# Altium PCB AFE#1.PcbDoc
Units mm, origin at the board's own origin, x right, y up, seen from the top; angles counter-clockwise.
Board outline 43.03 x 43.18 mm, 4 copper layers (Top Layer, Int1 (GND), Int2 (GND), Bottom Layer), stack 1.56 mm thick; 65 components, 51 nets, 213 pads, 60 vias.
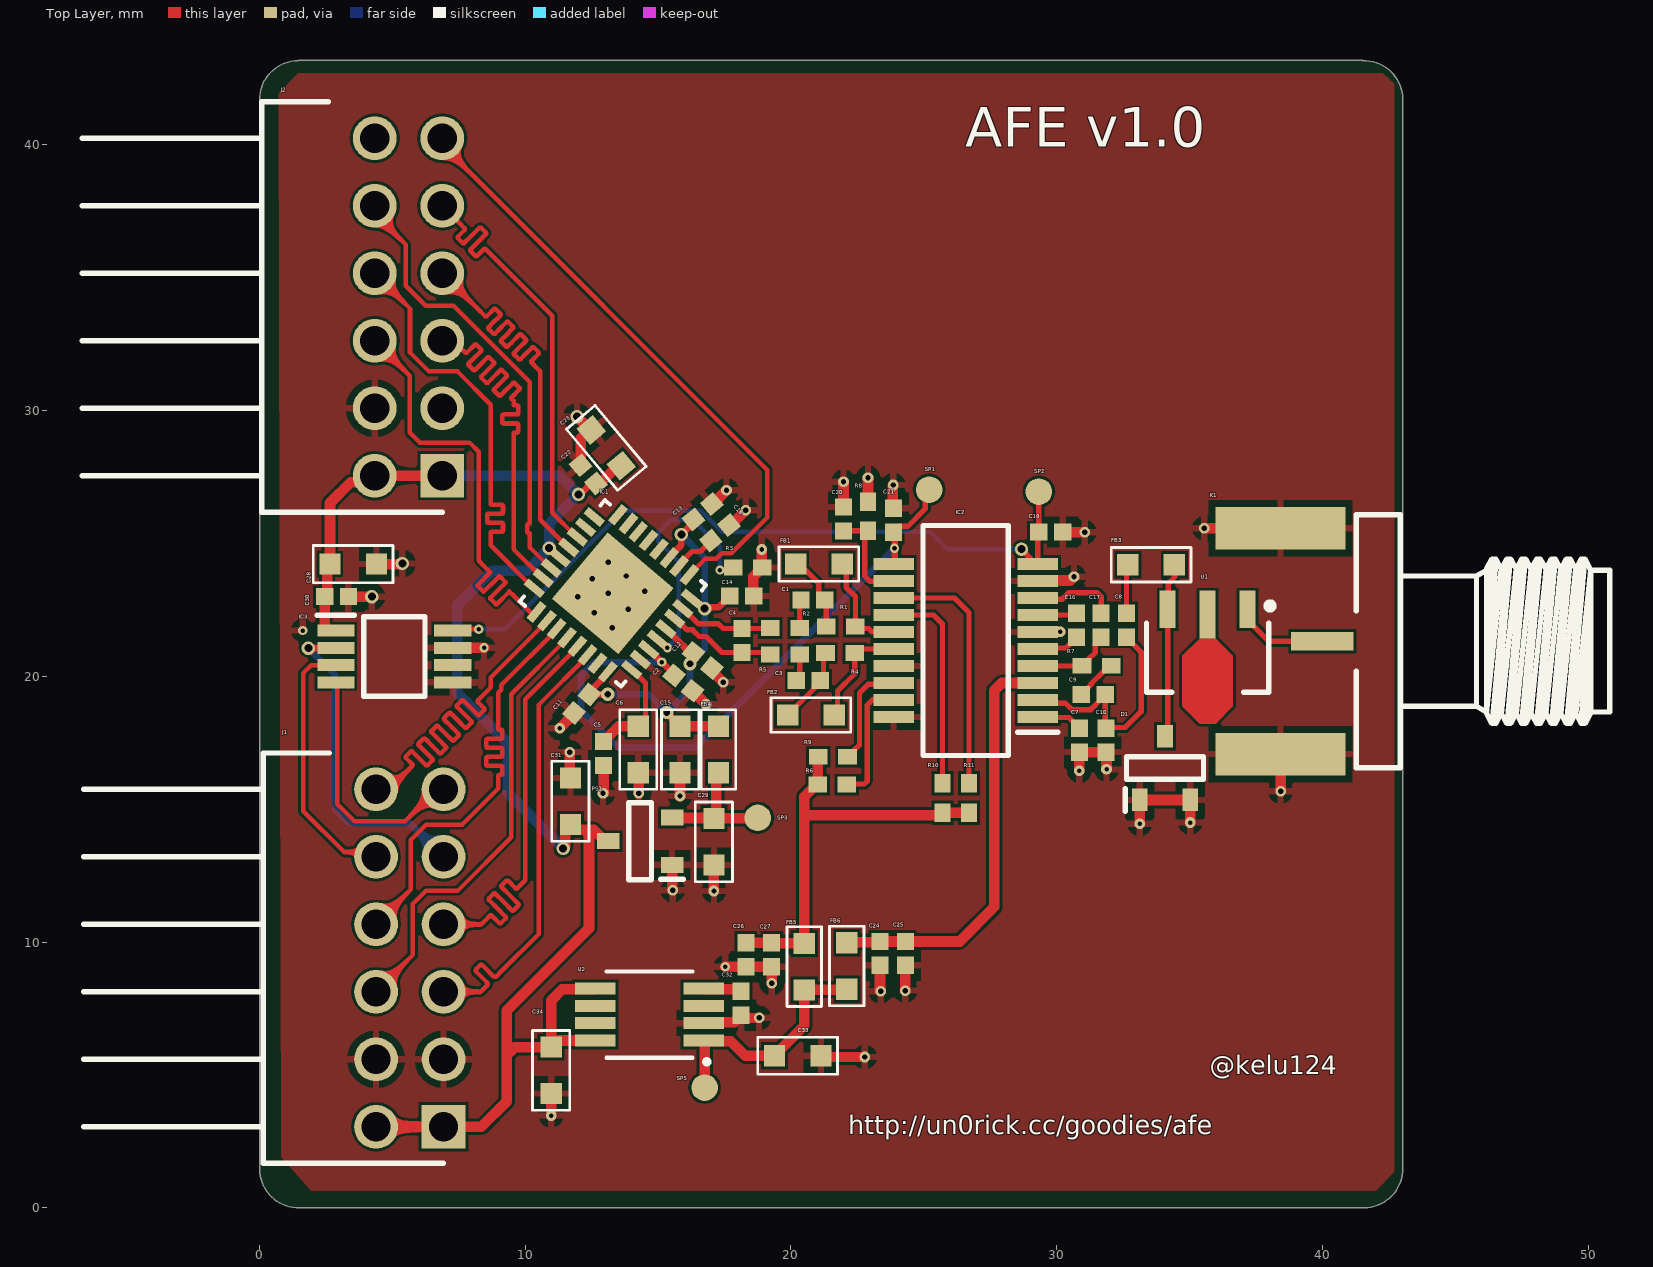
[diagram p0: Top Layer view]
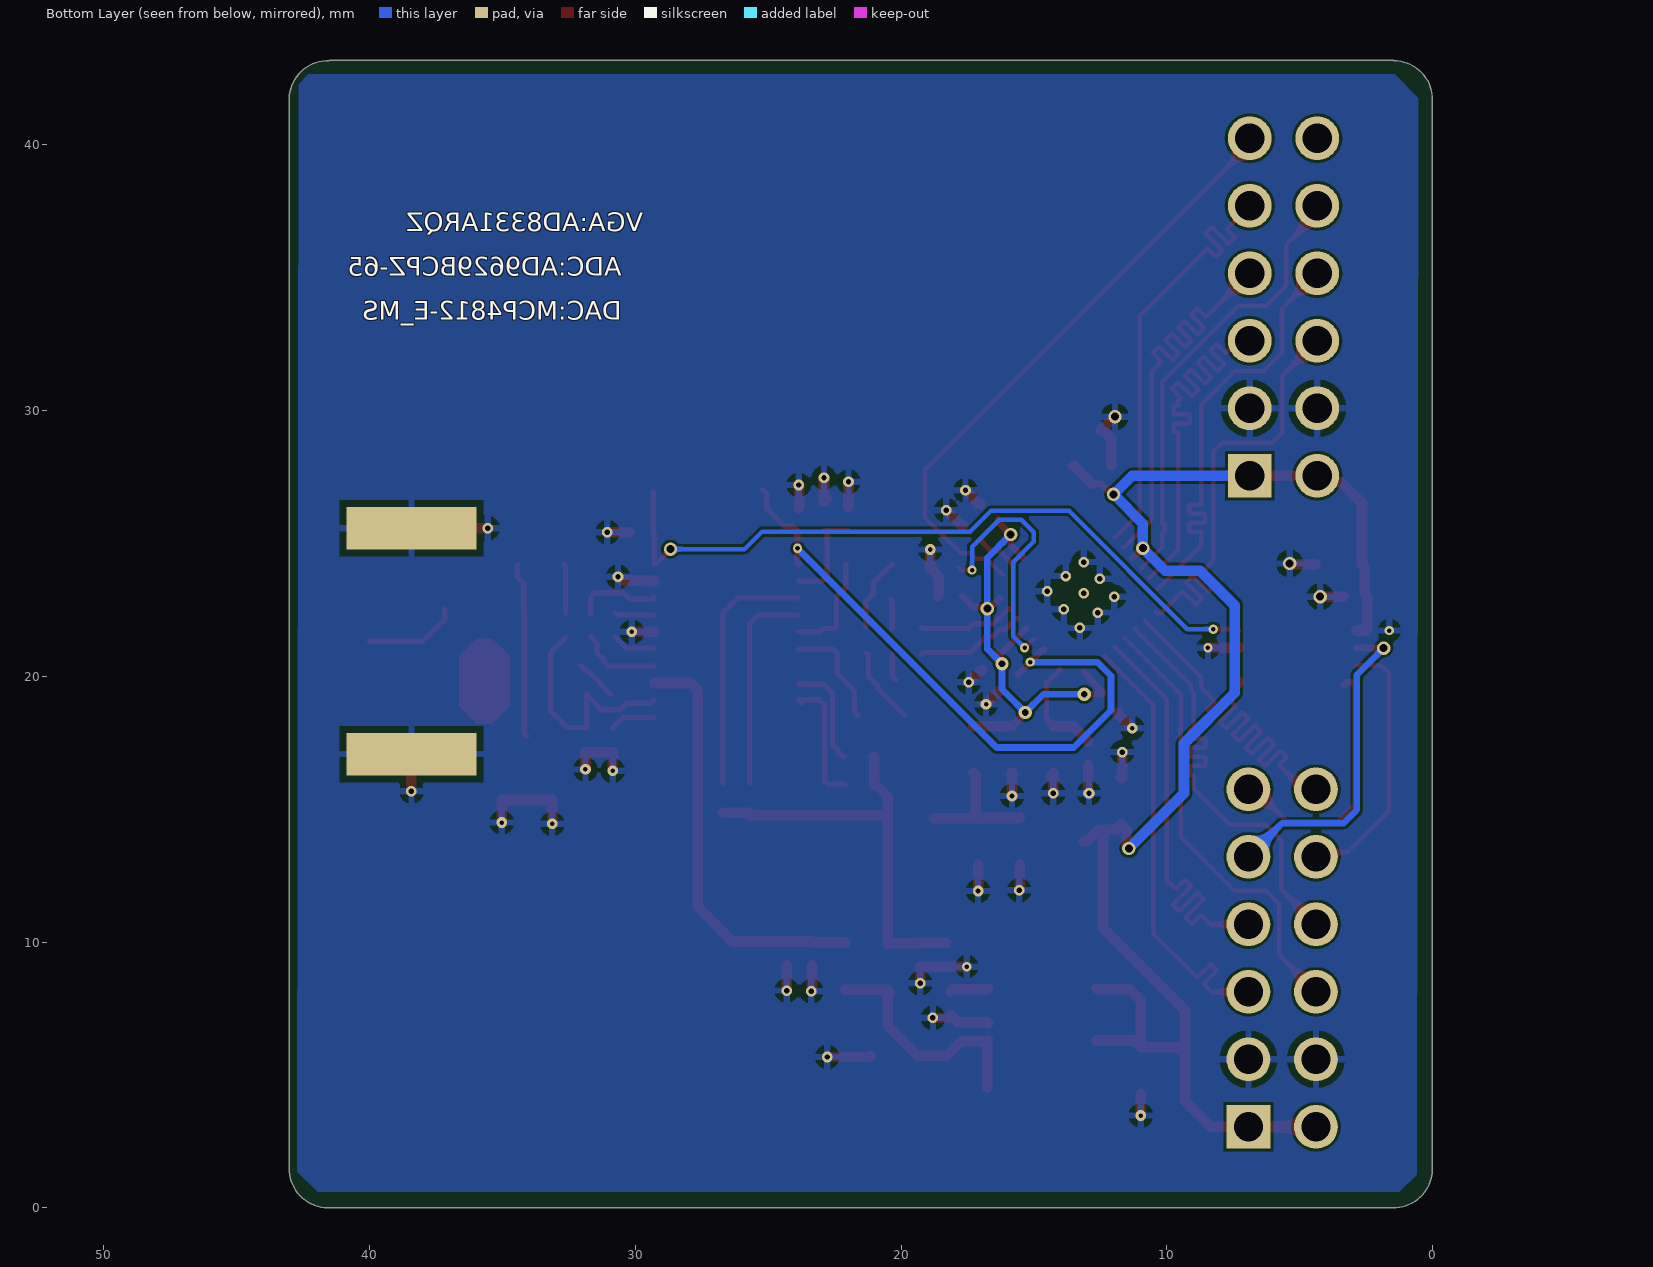
[diagram p1: Bottom Layer view, seen from below]
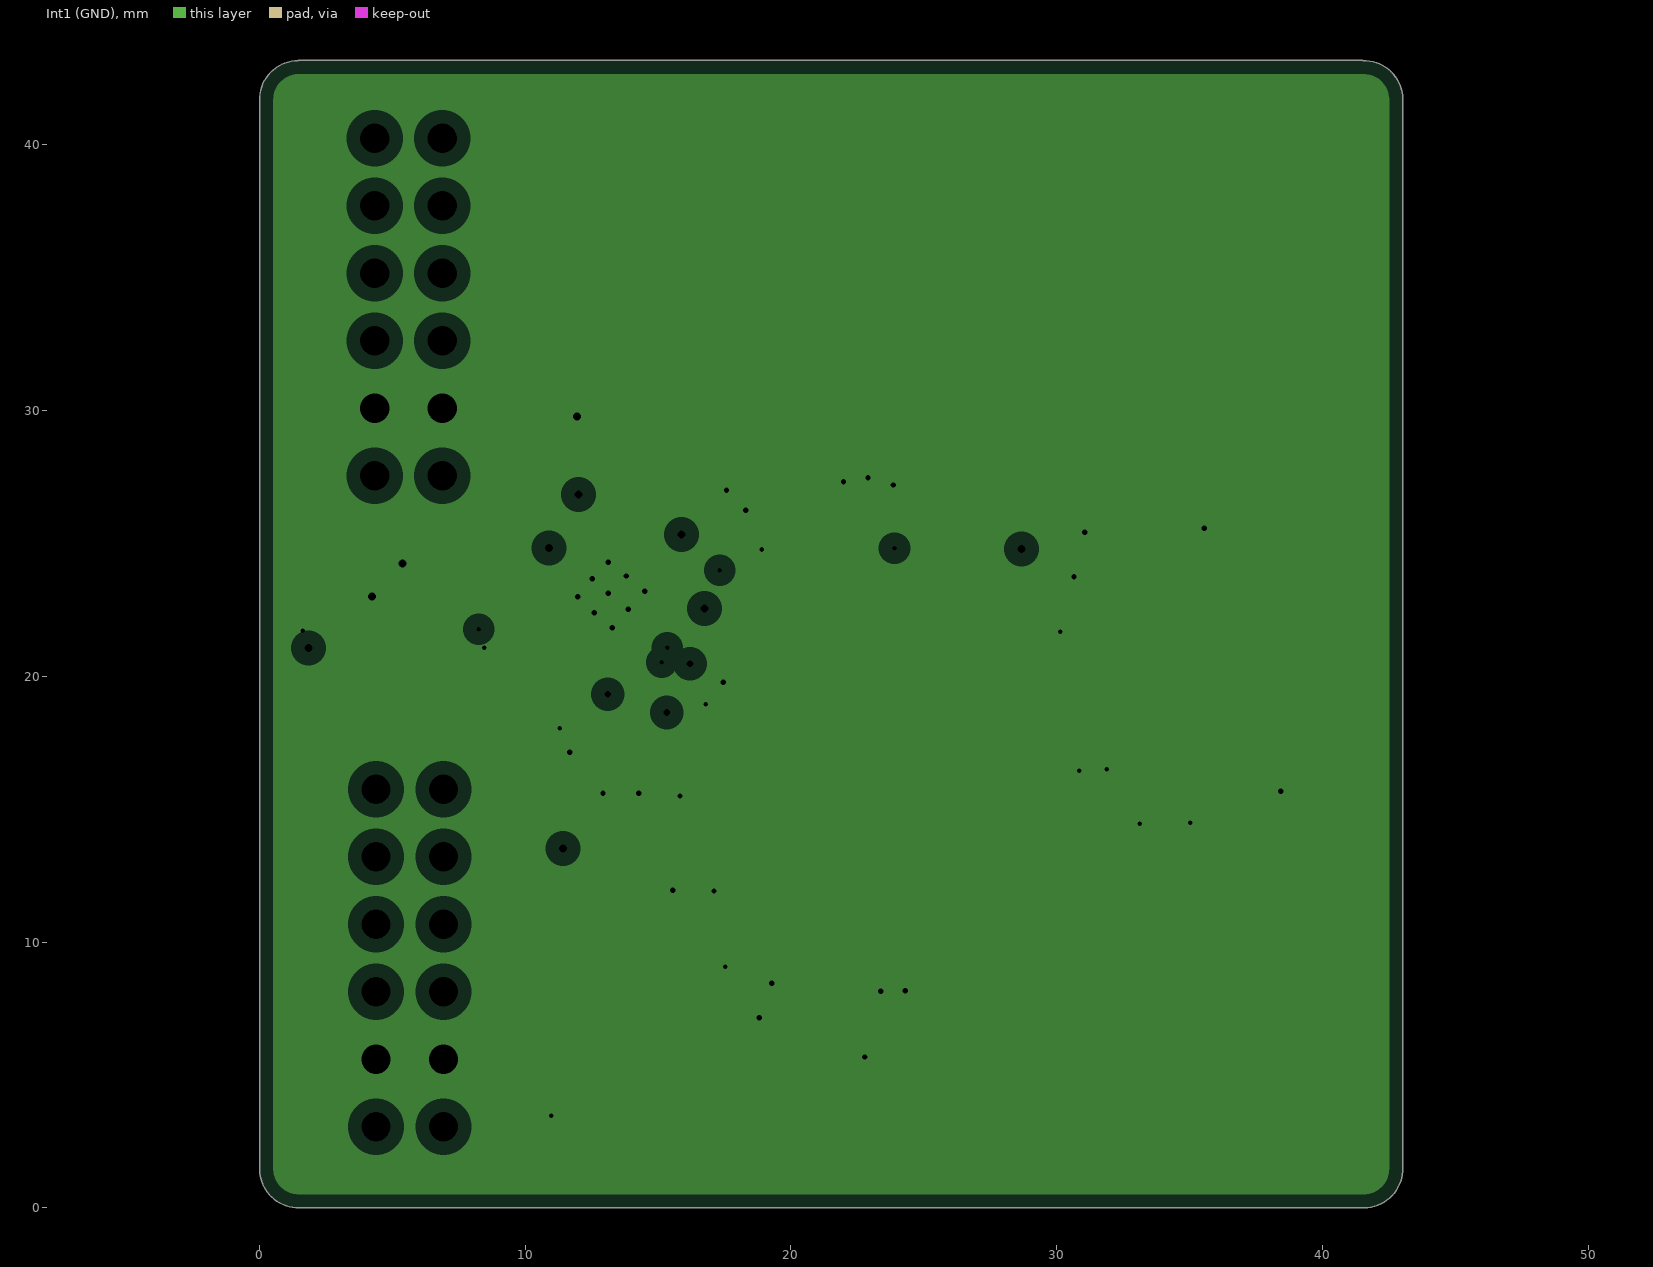
[diagram p2: Int1 (GND), clearances drawn from the general rule]
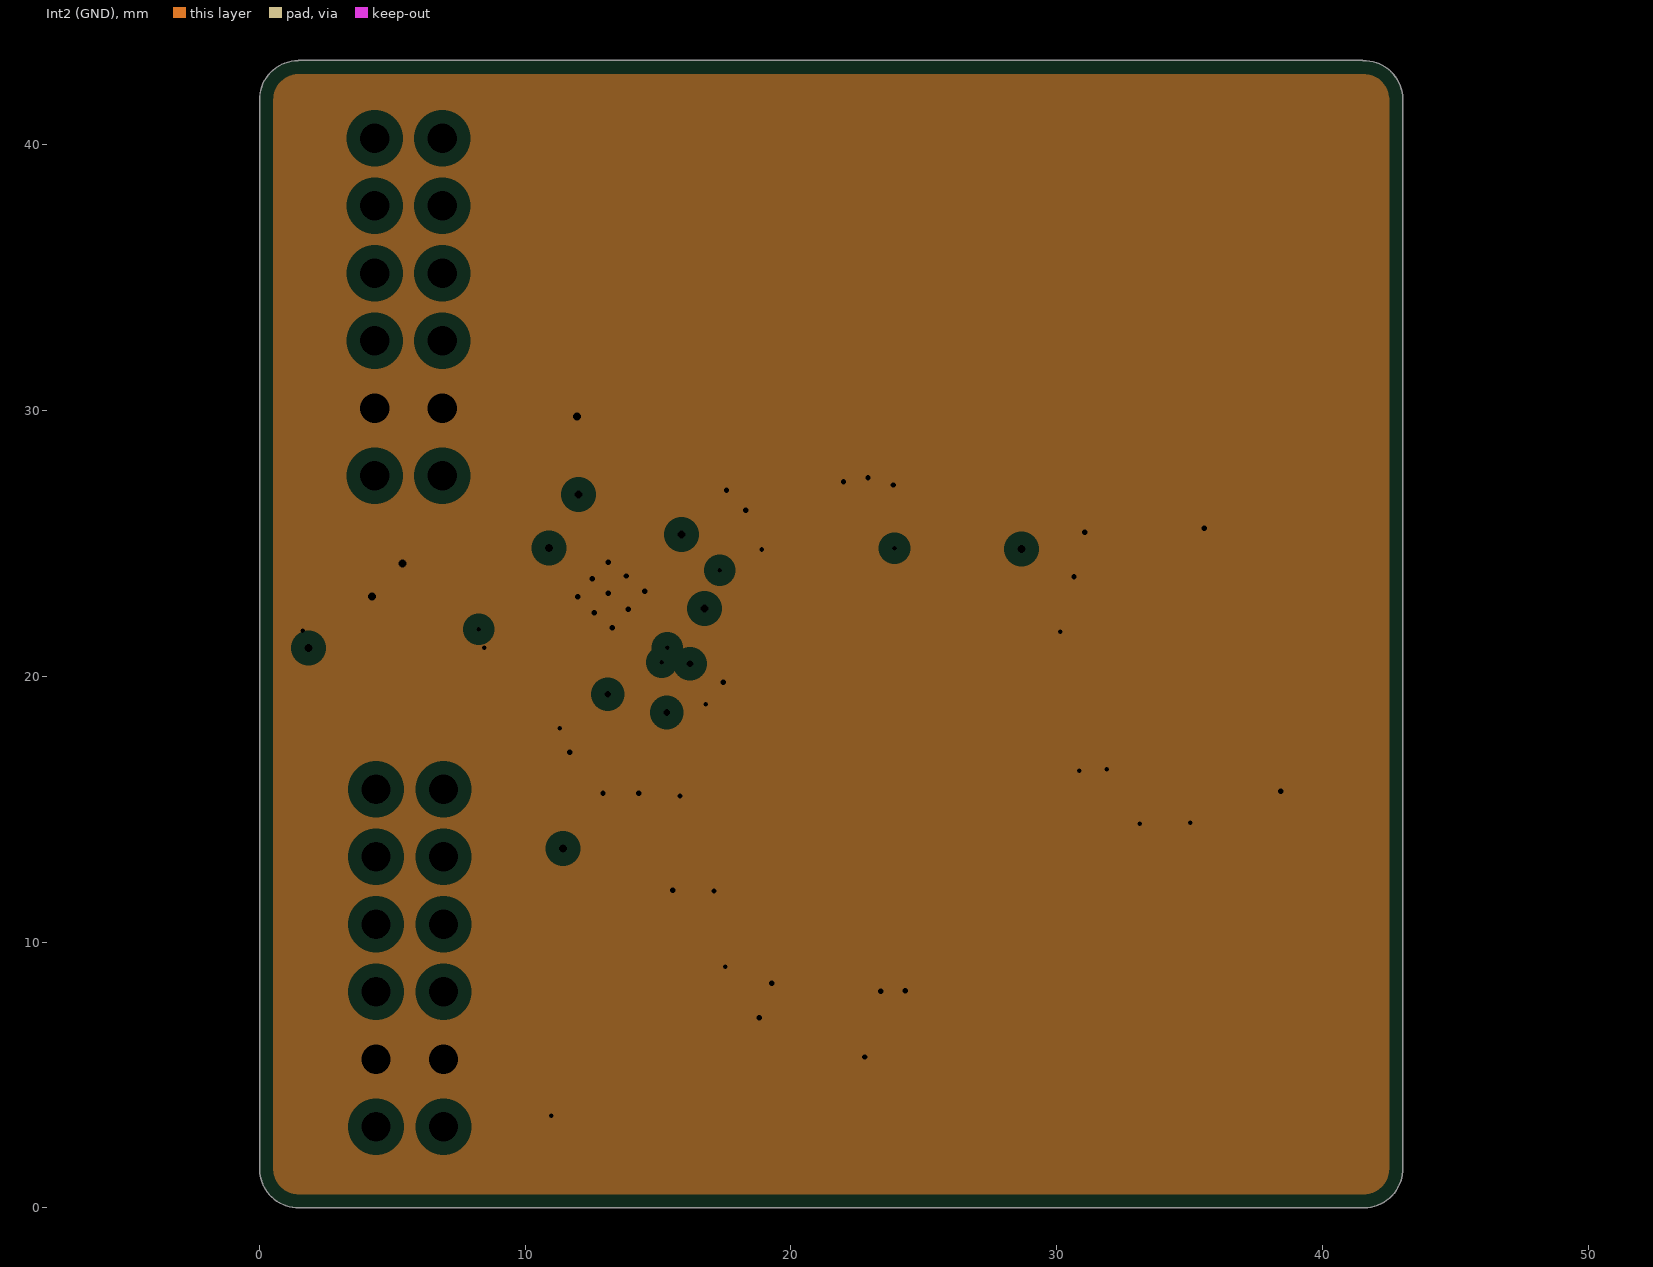
[diagram p3: Int2 (GND), clearances drawn from the general rule]
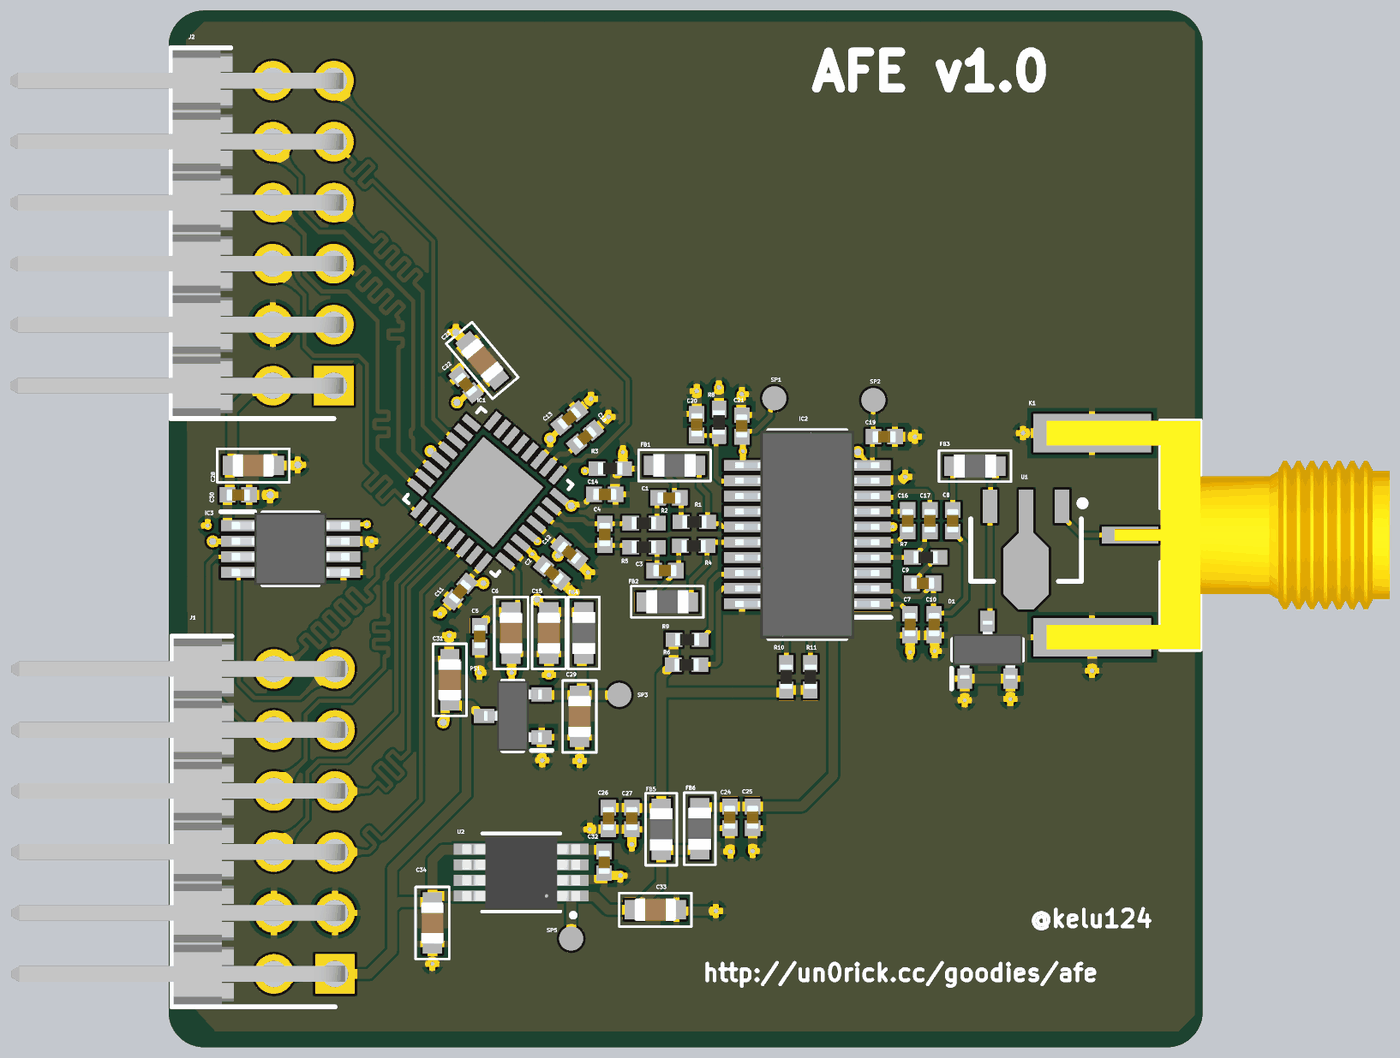
[diagram p4: 3D render of the assembled board from above, using the file's embedded part models]

## Layer stack, top to bottom
Top Solder: solder mask 0.0254, SM-001, Dk 4
Top Layer: signal copper 0.035
Dielectric 1: prepreg 0.11, PP-017, Dk 4.3
Int1 (GND): plane copper 0.035, net GND
Dielectric 3: core 1.2, Core-039, Dk 4.8
Int2 (GND): plane copper 0.035, net GND
Dielectric 5: prepreg 0.11, PP-017, Dk 4.3
Bottom Layer: signal copper 0.035
Bottom Solder: solder mask 0.0254, SM-001, Dk 4

## Board outline
0,1.45 0,41.675 cw(c1.475,41.7) 1.45,43.175 1.45,43.18 41.525,43.18 41.525,43.175 cw(c41.55,41.7) 43.025,41.725 43.025,1.5 cw(c41.55,1.475) 41.575,0 41.55,0 1.5,0 cw(c1.475,1.475)

## Design rules (kind name [scope] priority, off if disabled: settings)
Clearance [All] p1: gap=0.1 ignorepadtopadclearanceinfootprint=TRUE
ComponentClearance [All] p1: gap=0 collisioncheckmode=3 verticalgap=0 showdistances=FALSE
MatchedLengths "Schematic Matched Net Lengths" [InNetClass('Data')] p1: tolerance=0.508 checknetsindiffpair=FALSE checkdiffpairvsdiffpair=TRUE checkxsignals=TRUE checkothers=TRUE
PlaneClearance [All] p1: clearance=0.508
PlaneConnect [All] p1: planeconnectstyle=Relief reliefexpansion=0.508 reliefentries=4 reliefconductorwidth=0.254 reliefairgap=0.254
PolygonConnect [All] p1: connectstyle=Relief reliefconductorwidth=0.254 reliefentries=4 polygonreliefangle="90 Angle" airgapwidth=0.254
RoutingVias [All] p1: holewidth=0.2 width=0.4 viastyle="Through Hole" minholewidth=0.15 minwidth=0.3 maxholewidth=0.4 maxwidth=0.8
SilkToSilkClearance [All] p1: silktosilkclearance=0
SolderMaskExpansion [All] p1: expansion=0.102
UnRoutedNet [All] p1: checkbadconnections=TRUE
Width [All] p1: maxlimit=0.4 minlimit=0.15 preferedwidth=0.2
25 further rules are at their usual default settings.

## Classes and differential pairs
net class Data: D0 D1 D2 D3 D4 D5 D6 D7 D8 D9 DCO

## Components (designator, comment, footprint, x,y, rotation, side; value= is the part's Value field where it differs from the comment)
C1 "cap0402" 0402_C 20.825,22.875 r0 top value=100n
C2 "cap0402" 0402_C 15.95,19.75 r320 top value=100n
C3 "cap0402" 0402_C 20.65,19.85 r0 top value=100n
C4 "cap0402" 0402_C 18.15,21.35 r270 top value=18pf
C5 "cap0402" 0402_C 12.95,17.1 r90 top value=100n
C6 "cap0603" "SM0603 _3D_cap" 14.25,17.25 r90 top value=1u
C7 "cap0402" 0402_C 30.85,17.6 r90 top value=100n
C8 "cap0402" 0402_C 32.625,21.925 r270 top value=100n
C9 "cap0402" 0402_C 31.375,19.325 r0 top value=18n
C10 "cap0402" 0402_C 31.85,17.6 r90 top value=22pF
C11 "cap0402" 0402_C 12.125,18.975 r230 top value=100n
C12 "cap0402" 0402_C 16.675,20.6 r320 top value=100n
C13 "cap0402" 0402_C 16.675,26.2 r40 top value=100n
C14 "cap0402" 0402_C 18.15,23.025 r0 top value=100n
C15 "cap0402" "SM0603 _3D_cap" 15.825,17.25 r270 top value=10u
C16 "cap0402" 0402_C 30.75,21.925 r270 top value=100n
C17 "cap0402" 0402_C 31.675,21.925 r270 top value=100n
C18 "cap0402" 0402_C 17.325,25.4 r40 top value=100n
C19 "cap0402" 0402_C 29.775,25.425 r180 top value=1n
C20 "cap0402" 0402_C 21.975,25.925 r270 top value=100n
C21 "cap0402" 0402_C 23.85,25.875 r90 top value=100n
C22 "cap0402" 0402_C 12.375,27.6 r130 top value=100n
C23 "cap0603" "SM0603 _3D_cap" 13.05,28.6 r130 top value=10u
C24 "cap0402" 0402_C 23.35,9.575 r90 top value=1nf
C25 "cap0402" 0402_C 24.3,9.575 r90 top value=100nf
C26 "cap0402" 0402_C 18.3,9.525 r90 top value=1nf
C27 "cap0402" 0402_C 19.275,9.525 r90 top value=100nf
C28 "cap0603" "SM0603 _3D_cap" 3.525,24.225 r0 top value=10u
C29 "cap0603" "SM0603 _3D_cap" 17.1,13.775 r270 top value=4.7u
C30 "cap0402" 0402_C 2.9,23 r0 top value=100n
C31 "cap0603" "SM0603 _3D_cap" 11.7,15.3 r270 top value=4.7u
C32 "cap0402" 0402_C 18.125,7.7 r90 top value=470p
C33 "cap0603" "SM0603 _3D_cap" 20.25,5.725 r0 top value=1u
C34 "cap0603" "SM0603 _3D_cap" 10.975,5.175 r270 top value=1u
D1 "BAV99-7-F" SOT95P240X120-3N 34.075,16.55 r90 top
FB1 "75R@100MHz" SM0603_3D_res 21.05,24.225 r180 top
FB2 "75R@100MHz" SM0603_3D_res 20.75,18.55 r180 top
FB3 "75R@100MHz" SM0603_3D_res 33.55,24.2 r180 top
FB4 "75R@100MHz" SM0603_3D_res 17.275,17.25 r270 top
FB5 "75R@100MHz" SM0603_3D_res 20.5,9.075 r270 top
FB6 "75R@100MHz" SM0603_3D_res 22.1,9.1 r90 top
IC1 "AD9629BCPZ-65" QFN50P500X500X100-33N 13.3,23.125 r230 top
IC2 "AD8331ARQZ" SOP64P600X175-20N 26.575,21.35 r180 top
IC3 "MCP4812-E_MS" SOP65P490X110-8N 5.075,20.75 r0 top
J1 "90122-0126" HDRRA12W65P254_2X6_1516X250X615P 6.925,3.05 r90 top
J2 "90122-0126" HDRRA12W65P254_2X6_1516X250X615P 6.875,27.55 r90 top
K1 "SMA_Edge" AMPHENOL_132357-11 40,21.325 r180 top
PS1 "AP2127N-1.8TRG1" SOT89P240X110-3N 14.325,13.8 r180 top
R1 "100R" 0402_R 21.875,21.875 r180 top value=10k
R2 "18R" 0402_R 19.775,21.825 r180 top
R3 "10K" 0402_R 18.375,24.1 r180 top value=10k
R4 "100R" 0402_R 21.85,20.875 r180 top value=10k
R5 "18R" 0402_R 19.775,20.825 r180 top
R6 "10k" 0402_R 21.55,15.925 r0 top
R7 "280" 0402_R 31.5,20.4 r0 top
R8 "12k" 0402_R 22.9,26.025 r90 top
R9 "10k" 0402_R 21.575,16.975 r0 top
R10 "10k" 0402_R 25.7,15.425 r90 top
R11 "10k" 0402_R 26.7,15.425 r90 top
SP1 "SolderPad D1mm_round" "SolderPad_D1mm _round" 25.2,27.025 r90 top value="\"VCM\""
SP2 "SolderPad D1mm_round" "SolderPad_D1mm _round" 29.325,26.95 r90 top value="\"DG\""
SP3 "SolderPad D1mm_round" "SolderPad_D1mm _round" 18.75,14.675 r90 top value="\"+1.8V\""
SP5 "SolderPad D1mm_round" "SolderPad_D1mm _round" 16.75,4.525 r90 top value="\"+5V\""
U1 "T/R switch" SOT89-150P409X160-3N 35.675,20.725 r270 top
U2 "TC1107-5.0VUA" MSOP8_MC_MCH_ 14.675,7.275 r180 top

## Footprints (in the part's own frame and the unit in brackets; to place one, negate y for a bottom-side part, rotate by r counter-clockwise, add the part's x,y. Pads: shape width x height; smd on the part's side, far side on the other; paste and mask are expansions set on the pad)
0402_C [mm]
  rect 0.65x0.64 smd: 1(-0.45,0) 2(0.45,0)
  body extent -0.5,-0.25 0.5,0.25, height 0.56
0402_R [mm]
  rect 0.7x0.6 smd: 1(-0.55,0) 2(0.55,0)
  body extent -0.5,-0.25 0.5,0.25, height 0.35
AMPHENOL_132357-11 [mm]
  rect 2.35x0.7 smd: 1(0,0)
  rect 4.9x1.6 smd: 2(1.575,4.25) 2(1.575,-4.25)
  rect 4.9x1.6 smd far side: 2(1.575,4.25) 2(1.575,-4.25)
  silkscreen extent -10.81,-4.76 -1.28,4.76, body extent -10.8,-4.76 3.48,4.76, height 4.08
HDRRA12W65P254_2X6_1516X250X615P [mm]
  rect 1.65x1.65 hole 1.1: 1(0,0)
  round 1.65 hole 1.1: 2(0,2.54) 3(2.54,0) 4(2.54,2.54) 5(5.08,0) 6(5.08,2.54) 7(7.62,0) 8(7.62,2.54) 9(10.16,0) 10(10.16,2.54) 11(12.7,0) 12(12.7,2.54)
  silkscreen extent -1.37,0 14.07,13.54, body extent -1.27,-0.4 13.97,13.47, height 6.16
MSOP8_MC_MCH_ [mil]
  rect 60x18 smd paste+0 mask+0: 1(-80.5,38.39) 2(-80.5,12.8) 3(-80.5,-12.8) 4(-80.5,-38.39) 5(80.5,-38.39) 6(80.5,-12.8) 7(80.5,12.8) 8(80.5,38.39)
  silkscreen extent -87,-64 64,72, body extent -96,-59 96,59, height 43
QFN50P500X500X100-33N [mil]
  rect 32x12 smd: 1(-94,69) 2(-94,49) 3(-94,30) 4(-94,10) 5(-94,-10) 6(-94,-30) 7(-94,-49) 8(-94,-69) 17(94,-69) 18(94,-49) 19(94,-30) 20(94,-10) 21(94,10) 22(94,30) 23(94,49) 24(94,69)
  rect 12x32 smd: 9(-69,-94) 10(-49,-94) 11(-30,-94) 12(-10,-94) 13(10,-94) 14(30,-94) 15(49,-94) 16(69,-94) 25(69,94) 26(49,94) 27(30,94) 28(10,94) 29(-10,94) 30(-30,94) 31(-49,94) 32(-69,94)
  rect 128x128 smd: 33(0,0)
  silkscreen extent -98,-98 98,98
"SM0603 _3D_cap" [mm]
  rect 0.8x0.8 smd: 1(-0.875,0) 2(0.875,0)
  silkscreen extent -1.5,-0.7 1.5,0.7, body extent -0.87,-0.47 0.88,0.48, height 0.87
SM0603_3D_res [mm]
  rect 0.8x0.8 smd: 1(-0.875,0) 2(0.875,0)
  silkscreen extent -1.5,-0.65 1.5,0.65, body extent -0.87,-0.47 0.88,0.48, height 0.55
"SolderPad_D1mm _round" [mm]
  round 1 smd: 1(0,0)
SOP64P600X175-20N [mm]
  rect 1.52x0.44 smd: 1(-2.715,2.88) 2(-2.715,2.24) 3(-2.715,1.6) 4(-2.715,0.96) 5(-2.715,0.32) 6(-2.715,-0.32) 7(-2.715,-0.96) 8(-2.715,-1.6) 9(-2.715,-2.24) 10(-2.715,-2.88) 11(2.715,-2.88) 12(2.715,-2.24) 13(2.715,-1.6) 14(2.715,-0.96) 15(2.715,-0.32) 16(2.715,0.32) 17(2.715,0.96) 18(2.715,1.6) 19(2.715,2.24) 20(2.715,2.88)
  silkscreen extent -3.47,-4.33 1.61,4.33, body extent -3,-4.33 3,4.33, height 1.75
SOP65P490X110-8N [mm]
  rect 1.4x0.45 smd: 1(-2.2,0.975) 2(-2.2,0.325) 3(-2.2,-0.325) 4(-2.2,-0.975) 5(2.2,-0.975) 6(2.2,-0.325) 7(2.2,0.325) 8(2.2,0.975)
  silkscreen extent -2.9,-1.5 1.15,1.55, body extent -2.45,-1.5 2.45,1.5, height 1.1
SOT89-150P409X160-3N [mm]
  rect 1.4x0.6 smd: 1(-1.8,1.5) 3(-1.8,-1.5)
  rect 1.8x0.6 smd: 2(-1.6,0)
  Top Layer region: -0.7,0.3 -0.05,0.95 1.85,0.95 2.5,0.3 2.5,-0.3 1.85,-0.95 -0.05,-0.95 -0.7,-0.3
  silkscreen extent -2.05,-2.3 1.32,2.48, body extent -1.28,-2.3 1.32,2.3, height 1.6
SOT89P240X110-3N [mm]
  rect 0.85x0.6 smd: 1(-1.2,0.89) 2(-1.2,-0.89) 3(1.2,0)
  silkscreen extent -1.63,-1.45 0.43,1.45, body extent -1.2,-1.45 1.2,1.45, height 1.1
SOT95P240X120-3N [mm]
  rect 0.85x0.6 smd: 1(-1.2,0.95) 2(-1.2,-0.95) 3(1.2,0)
  silkscreen extent -1.63,-1.45 0.43,1.5, body extent -1.2,-1.45 1.2,1.45, height 1.2

## Part data
C1 C2 C3 C4 C5 C7 C8 C9 C10 C11 C12 C13 C14 C15 C16 C17 C18 C19 C20 C21 C22 C25 C27 C30 C32: library part cap0603, "Capacitor  0402 inch", LatestRevisionDate=17-Jul-2002, LatestRevisionNote="Re-released for DXP Platform.", PackageDescription="Radial Cap, Thru-Hole; 2 Leads; 0.3 in Pin Spacing", PackageReference=RAD-0.3, Published=8-Jun-2000, Publisher="Altium Limited"
C6 C23 C28 C29 C31 C33 C34: "Capacitor  0603 inch", LatestRevisionDate=17-Jul-2002, LatestRevisionNote="Re-released for DXP Platform.", PackageDescription="Radial Cap, Thru-Hole; 2 Leads; 0.3 in Pin Spacing", PackageReference=RAD-0.3, Published=8-Jun-2000, Publisher="Altium Limited"
C24 C26: library part cap0603, "Capacitor  0603 inch", LatestRevisionDate=17-Jul-2002, LatestRevisionNote="Re-released for DXP Platform.", PackageDescription="Radial Cap, Thru-Hole; 2 Leads; 0.3 in Pin Spacing", PackageReference=RAD-0.3, Published=8-Jun-2000, Publisher="Altium Limited"
D1: "Diode", Manufacturer_Name="Diodes Inc.", Mouser Part Number=621-BAV99-F, Arrow Part Number=BAV99-7-F, Arrow Price/Stock=https://www.arrow.com/en/products/bav99-7-f/diodes-incorporated?region=nac, Datasheet Link=https://www.diodes.com/assets/Datasheets/ds12007.pdf, Height=1.2mm, Manufacturer_Part_Number=BAV99-7-F, Mouser Price/Stock=https://www.mouser.co.uk/ProductDetail/Diodes-Incorporated/BAV99-7-F?qs=E9Ihi8A05%252BSTVRjo74hQDA%3D%3D
FB1 FB2 FB3 FB4 FB5 FB6: "chip inductance 0603", Case=0805, Manufacturer=MURATA, Manufacturer Part Number=BLM21BB750SN1D, Part Number=IND0805_MURATA_BLM21BB750SN1D, Power=700mA, Resistance=0.16R, Tolerance=±25%, Author="S. Jafar", ComponentHeight=1.05mm, Component Type=Standard, CreateDate=12/21/2015, LatestRevisionDate=12/21/2015, Mounted=Yes, Part Description="SMD EMIFIL Suppression Chip Ferrite Bead", Pin Count=2, SMD=Yes, Socket=No, Status=None, Table="Inductors SMD"
IC1: "Integrated Circuit", Manufacturer_Name="Analog Devices", Mouser Part Number=584-AD9629BCPZ-65, Arrow Part Number=AD9629BCPZ-65, Arrow Price/Stock=https://www.arrow.com/en/products/ad9629bcpz-65/analog-devices, Manufacturer_Part_Number=AD9629BCPZ-65, Mouser Price/Stock=https://www.mouser.co.uk/ProductDetail/Analog-Devices/AD9629BCPZ-65?qs=BpaRKvA4VqGjvk9AFyB3jg%3D%3D
IC2: "Integrated Circuit", Manufacturer_Name="Analog Devices", Mouser Part Number=584-AD8331ARQZ, Arrow Part Number=AD8331ARQZ, Arrow Price/Stock=https://www.arrow.com/en/products/ad8331arqz/analog-devices, Datasheet Link=http://www.analog.com/static/imported-files/data_sheets/AD8331_8332_8334.pdf, Height=1.75mm, Manufacturer_Part_Number=AD8331ARQZ, Mouser Price/Stock=https://www.mouser.co.uk/ProductDetail/Analog-Devices/AD8331ARQZ?qs=%2FtpEQrCGXCwx0%2F22gf7ohQ%3D%3D
IC3: "Integrated Circuit", Arrow Part Number=MCP4812-E/MS, Manufacturer_Name=Microchip, Mouser Part Number=579-MCP4812-E/MS, Arrow Price/Stock=https://www.arrow.com/en/products/mcp4812-ems/microchip-technology, Datasheet Link=http://ww1.microchip.com/downloads/en/DeviceDoc/20002249B.pdf, Height=1.1mm, Manufacturer_Part_Number=MCP4812-E/MS, Mouser Price/Stock=https://www.mouser.co.uk/ProductDetail/Microchip-Technology/MCP4812-E-MS?qs=bxUt0k7cytJEpyWPtzKy6A%3D%3D
J1 J2: "Connector", Manufacturer_Name=Molex, Mouser Part Number=538-90122-0126, Datasheet Link=https://componentsearchengine.com/Datasheets/2/90122-0126.pdf, Height=6.15mm, Manufacturer_Part_Number=90122-0126, Mouser Price/Stock=https://www.mouser.co.uk/ProductDetail/Molex/90122-0126?qs=PvP5v7Eimsm0iCqn6boA0w%3D%3D
PS1: library part AP2127N-3.3TRG1, "Power Supply", Manufacturer_Name="Diodes Inc.", Mouser Part Number=621-AP2127N-3.3TRG1, Arrow Part Number=AP2127N-3.3TRG1, Arrow Price/Stock=https://www.arrow.com/en/products/ap2127n-3.3trg1/diodes-incorporated, Datasheet Link=https://componentsearchengine.com/Datasheets/1/AP2127N-3.3TRG1.pdf, Height=1.1mm, Manufacturer_Part_Number=AP2127N-3.3TRG1, Mouser Price/Stock=https://www.mouser.co.uk/ProductDetail/Diodes-Incorporated/AP2127N-33TRG1/?qs=x6A8l6qLYDCwIat%252BGHxAAg%3D%3D
R1 R3 R4: library part RC0402FR-0710KL, "RES 10K OHM 1/16W 0402 SMD", Package / Case="0402 (1005 Metric)", Power (Watts)="0.063W, 1/16W", .Checked PCB=used, .Checked SCH=used, Category=Resistors, ComponentLink1Description=http://www.yageo.com/documents/recent/PYu-RC0402_51_RoHS_L_6.pdf, ComponentLink1URL=http://www.yageo.com/documents/recent/PYu-RC0402_51_RoHS_L_6.pdf, Height="0.016\" (0.40mm)", Size / Dimension="0.039\" L x 0.020\" W (1.00mm x 0.50mm)"
R2 R5: library part RC0402FR-0710KL, "RES 18 OHM 1/16W 0402 SMD", Package / Case="0402 (1005 Metric)", Power (Watts)="0.063W, 1/16W", .Checked PCB=used, .Checked SCH=used, Category=Resistors, ComponentLink1Description=http://www.yageo.com/documents/recent/PYu-RC0402_51_RoHS_L_6.pdf, ComponentLink1URL=http://www.yageo.com/documents/recent/PYu-RC0402_51_RoHS_L_6.pdf, Height="0.016\" (0.40mm)", Size / Dimension="0.039\" L x 0.020\" W (1.00mm x 0.50mm)"
R6 R9 R10 R11: library part RC0402FR-0710KL, "RES 10K OHM 1/16W 1% 0402 SMD", Package / Case="0402 (1005 Metric)", Power (Watts)="0.063W, 1/16W", Resistance (Ohms)=280, .Checked PCB=used, .Checked SCH=used, Category=Resistors, ComponentLink1Description=http://www.yageo.com/documents/recent/PYu-RC0402_51_RoHS_L_6.pdf, ComponentLink1URL=http://www.yageo.com/documents/recent/PYu-RC0402_51_RoHS_L_6.pdf, Height="0.016\" (0.40mm)", Size / Dimension="0.039\" L x 0.020\" W (1.00mm x 0.50mm)"
R7: library part RC0402FR-0710KL, "RES 280 OHM 1/16W 0402 SMD", Package / Case="0402 (1005 Metric)", Power (Watts)="0.063W, 1/16W", .Checked PCB=used, .Checked SCH=used, Category=Resistors, ComponentLink1Description=http://www.yageo.com/documents/recent/PYu-RC0402_51_RoHS_L_6.pdf, ComponentLink1URL=http://www.yageo.com/documents/recent/PYu-RC0402_51_RoHS_L_6.pdf, Height="0.016\" (0.40mm)", Resistance (Ohms)=280, Size / Dimension="0.039\" L x 0.020\" W (1.00mm x 0.50mm)"
R8: library part RC0402FR-0710KL, "RES 12K OHM 1/16W 0402 SMD", Package / Case="0402 (1005 Metric)", Power (Watts)="0.063W, 1/16W", .Checked PCB=used, .Checked SCH=used, Category=Resistors, ComponentLink1Description=http://www.yageo.com/documents/recent/PYu-RC0402_51_RoHS_L_6.pdf, ComponentLink1URL=http://www.yageo.com/documents/recent/PYu-RC0402_51_RoHS_L_6.pdf, Height="0.016\" (0.40mm)", Size / Dimension="0.039\" L x 0.020\" W (1.00mm x 0.50mm)"
SP1 SP2 SP3 SP5: "for finger touch"
U1: library part MD0100N8-G
U2: "No Description Available", Mfr_Name=Microchip, Copyright="Copyright (C) 2022 Ultra Librarian. All rights reserved.", Manufacturer_Part_Number=TC1107-5.0VUA, RefDes=RefDes, Type=DEV

## Via types
v1: diameter 0.4, hole 0.2, Top Layer to Bottom Layer, 30 vias
v2: diameter 0.5, hole 0.3, Top Layer to Bottom Layer, 10 vias
v3: diameter 0.4, hole 0.17, Top Layer to Bottom Layer, 9 vias
v4: diameter 0.35, hole 0.17, Top Layer to Bottom Layer, 8 vias
v5: diameter 0.5, hole 0.254, Top Layer to Bottom Layer, 3 vias

## Nets (pads, with @x,y where several pads share a name; then routed paths per layer and width w, separated by ;. In a path a pad name is that pad's centre, name@x,y a point inside that pad or via, vN(x,y) a via of type N, cw(c..) or ccw(c..) an arc to the next point about the centre after c; other vN are vias at no path point)
5VLNA: C24.2 C25.2 FB6.2 IC2.3 | length 16
  Top Layer w0.4: FB6.2 22.125,10 23.325,10 C24.2 C25.2 26.35,10.025 27.65,11.325 27.65,19.47 27.93,19.75 IC2.3
5VVGA: C26.2 C27.2 FB5.1 R6.1 R9.1 R10.1 R11.1 | length 15.7
  Top Layer w0.4: C26.2 C27.2 19.288,9.962 20.488,9.962 FB5.1 20.5,14.75 ; R9.1 21.013,16.963 21.013,15.938 R6.1 20.95,15.925 20.5,15.475 20.5,14.75 ; R10.1@25.7,14.775 20.525,14.775 20.5,14.75 ; R10.1 R11.1
+1V8: C29.1 FB4.2 PS1.2 SP3.1 | length 5
  Top Layer w0.4: PS1.2 15.545,14.67 17.08,14.67 C29.1 C29.1@17.113,14.662 ; FB4.2 17.188,16.287 17.188,14.737 C29.1@17.113,14.662 ; SP3.1 18.737,14.662 C29.1@17.113,14.662
+1V8f: C11.1 C12.1 C13.1 C14.1 C15.1 FB4.1 IC1.3 IC1.24 IC1.29 IC1.32 | length 19.7
  Top Layer w0.25: v5(13.1,19.325) 13.098,19.323 12.417,19.323 C11.1 12.414,19.414 12.931,19.931 12.931,19.98 12.925,19.987 IC1.24 ; IC1.29 15.315,21.785 15.315,21.774 16.255,20.833 16.255,20.814 C12.1 16.33,20.605 v5(16.2,20.475) ; IC1.3 15.418,24.493 15.875,24.95 v2(15.875,25.338) 16.33,25.794 C13.1 ; IC1.32 16.292,22.933 16.675,22.55 16.723,22.598 17.268,22.598 17.695,23.025 C14.1
  Top Layer w0.3: v5(15.325,18.638) 15.325,18.625 C15.1
  Top Layer w0.4: C15.1 FB4.1
  Bottom Layer w0.25: v5(13.1,19.325) 14.638,19.325 v5(15.325,18.638) 16.2,19.513 v5(16.2,20.475) 16.75,21.025 v2(16.75,22.55) 16.75,24.463 v2(15.875,25.338)
+3V3: C22.1 C23.1 C28.1 C30.1 C31.2 C34.1 IC1.13 IC3.1 J1.1 J1.2 J2.1 J2.2 PS1.3 U2.5 U2.8 | length 62.4
  Top Layer w0.25: v2(10.9,24.825) 10.925,24.825 11.285,24.465 IC1.13 IC1.13@11.273,24.5 ; v2(12,26.85) 12.068,26.85 12.473,27.255 C22.1 C22.1@12.801,27.255 ; C23.1@13.475,27.93 C23.1
  Top Layer w0.4: IC3.1 2.475,21.725 2.45,21.75 C30.1 2.55,23.1 2.55,24.125 C28.1 2.65,26.525 3.436,27.311 4.096,27.311 J2.2 J2.1 ; J1.2 J1.1 8.35,3.05 9.3,4 9.3,5.75 ; v2(11.425,13.525) 11.425,13.552 11.5,13.627 11.5,14.225 C31.2 11.9,14.225 12.245,14.225 ; U2.8 11.225,6.3 C34.1 ; U2.5 12.602,8.221 11.396,8.221 10.975,7.8 C34.1 ; C22.1@12.801,27.255 C23.1@13.475,27.93 ; PS1.3 13,13.8 12.575,14.225 12.245,14.225 ; 9.3,5.75 9.3,7.425 12.4,10.525 12.4,14.069 12.245,14.225 ; 9.3,5.75 9.6,6.05 C34.1
  Bottom Layer w0.4: J2.1 11.3,27.55 v2(12,26.85) 10.9,25.75 v2(10.9,24.825) 10.05,23.975 8.75,23.975 7.441,22.666 7.441,19.384 9.35,17.475 9.35,15.6 v2(11.425,13.525)
+5V: C33.1 FB5.2 FB6.1 SP5.1 U2.1 | length 9.3
  Top Layer w0.4: U2.1 16.748,6.271 U2.1@16.75,6.271 ; SP5.1 U2.1@16.75,6.271 ; FB6.1 22.087,8.213 20.513,8.213 FB5.2 20.425,8.125 20.5,8.05 20.5,6.85 C33.1 18.275,5.725 17.729,6.271 U2.1@16.75,6.271
CLK+: IC1.1 J2.11 | length 23.2
  Top Layer w0.17: J2.11 6.875,40 19.1,27.775 19.1,25.975 17.758,24.633 17.39,24.633 17.189,24.432 16.782,24.432 IC1.1
CS: IC3.2 J1.9 | length 12.5
  Top Layer w0.25: v2@1.95,20.95 v2(1.836,21.064) 1.842,21.069 2.869,21.069 IC3.2
  Bottom Layer w0.25: v2(1.836,21.064) 2.85,20.05 2.85,14.975 3.35,14.475 5.66,14.475 J1.9
D0: IC1.11 J2.9 | length 17.1
  Top Layer w0.17: J2.9 7.442,37.143 7.511,37.074 7.715,36.87 cw(c7.679,36.834) 7.715,36.798 7.47,36.553 ccw(c7.506,36.517) 7.47,36.481 7.638,36.312 ccw(c7.674,36.348) 7.71,36.312 7.991,36.594 8.273,36.875 cw(c8.309,36.839) 8.345,36.875 8.513,36.707 cw(c8.477,36.67) 8.513,36.634 8.232,36.353 7.951,36.072 ccw(c7.987,36.036) 7.951,36 8.119,35.831 ccw(c8.155,35.868) 8.191,35.831 8.436,36.077 cw(c8.472,36.041) 8.508,36.077 8.592,35.993 11.013,33.573 11.013,26.16 11.929,25.243 IC1.11
D1: IC1.12 J2.7 | length 17.2
  Top Layer w0.17: J2.7 8.235,33.81 8.485,33.56 ccw(c8.521,33.596) 8.558,33.56 8.814,33.816 cw(c8.85,33.78) 8.886,33.816 9.055,33.648 cw(c9.019,33.612) 9.055,33.576 8.762,33.283 8.622,33.143 ccw(c8.658,33.107) 8.622,33.071 8.79,32.902 ccw(c8.826,32.938) 8.862,32.902 9.002,33.043 9.295,33.336 cw(c9.331,33.3) 9.367,33.336 9.536,33.167 cw(c9.5,33.131) 9.536,33.095 9.243,32.802 9.102,32.662 ccw(c9.139,32.626) 9.102,32.59 9.271,32.422 ccw(c9.307,32.458) 9.343,32.422 9.483,32.562 9.776,32.855 cw(c9.812,32.819) 9.848,32.855 10.016,32.686 cw(c9.98,32.65) 10.016,32.614 9.724,32.321 9.583,32.181 ccw(c9.619,32.145) 9.583,32.109 9.752,31.941 ccw(c9.788,31.977) 9.824,31.941 9.964,32.081 10.257,32.374 cw(c10.293,32.338) 10.329,32.374 10.497,32.206 cw(c10.461,32.17) 10.497,32.133 10.24,31.877 ccw(c10.277,31.841) 10.24,31.805 10.445,31.6 10.565,31.48 10.565,25.892 11.603,24.854 IC1.12
D2: IC1.14 J2.10 | length 17.1
  Top Layer w0.17: J2.10 4.335,37.415 5.5,36.25 5.5,34.7 6.25,33.95 7.3,33.95 10.177,31.073 10.177,26.325 10.177,25.786 cw(c10.126,25.786) 10.126,25.735 ccw(c10.126,25.684) 10.075,25.684 10.075,25.446 ccw(c10.126,25.446) 10.126,25.395 cw(c10.126,25.344) 10.177,25.344 10.177,25.225 10.177,24.849 10.95,24.076 IC1.14
D3: IC1.15 J2.5 | length 17.3
  Top Layer w0.17: J2.5 7.275,32.63 7.63,32.275 7.65,32.275 7.734,32.191 ccw(c7.77,32.227) 7.806,32.191 8.093,32.478 cw(c8.129,32.442) 8.165,32.478 8.334,32.31 cw(c8.298,32.274) 8.334,32.238 8.011,31.914 7.875,31.779 ccw(c7.911,31.743) 7.875,31.707 8.043,31.538 ccw(c8.079,31.574) 8.115,31.538 8.251,31.674 8.574,31.997 cw(c8.61,31.961) 8.646,31.997 8.815,31.829 cw(c8.779,31.793) 8.815,31.757 8.491,31.434 8.356,31.298 ccw(c8.392,31.262) 8.356,31.226 8.524,31.058 ccw(c8.56,31.094) 8.596,31.058 8.732,31.193 9.055,31.516 cw(c9.091,31.48) 9.127,31.516 9.295,31.348 cw(c9.259,31.312) 9.295,31.276 8.972,30.953 8.837,30.817 ccw(c8.873,30.781) 8.837,30.745 9.005,30.577 ccw(c9.041,30.613) 9.077,30.577 9.213,30.712 9.536,31.035 cw(c9.572,30.999) 9.608,31.035 9.776,30.867 cw(c9.74,30.831) 9.776,30.795 9.489,30.508 ccw(c9.525,30.472) 9.489,30.436 9.559,30.366 9.559,30.247 ccw(c9.61,30.247) 9.61,30.196 9.686,30.196 cw(c9.686,30.145) 9.737,30.145 9.737,29.907 cw(c9.686,29.907) 9.686,29.856 9.559,29.856 9.19,29.856 ccw(c9.19,29.805) 9.139,29.805 9.139,29.567 ccw(c9.19,29.567) 9.19,29.516 9.559,29.516 9.686,29.516 cw(c9.686,29.465) 9.737,29.465 9.737,29.227 cw(c9.686,29.227) 9.686,29.176 9.61,29.176 ccw(c9.61,29.125) 9.559,29.125 9.559,28.45 9.559,24.787 10.64,23.706 IC1.15
D4: IC1.16 J2.8 | length 16.9
  Top Layer w0.17: J2.8 5.662,33.843 5.662,32.187 6.375,31.475 7.45,31.475 8.7,30.225 8.7,28 8.7,26.511 ccw(c8.751,26.511) 8.751,26.46 9.112,26.46 cw(c9.112,26.409) 9.163,26.409 9.163,26.171 cw(c9.112,26.171) 9.112,26.12 8.7,26.12 8.616,26.12 ccw(c8.616,26.069) 8.565,26.069 8.565,25.831 ccw(c8.616,25.831) 8.616,25.78 8.7,25.78 9.112,25.78 cw(c9.112,25.729) 9.163,25.729 9.163,25.491 cw(c9.112,25.491) 9.112,25.44 8.751,25.44 ccw(c8.751,25.389) 8.7,25.389 8.7,25.1 8.7,24.93 10.313,23.317 IC1.16
D5: IC1.17 J2.6 | length 17.1
  Top Layer w0.17: J2.6 5.65,31.315 5.65,29.175 6.025,28.8 7.9,28.8 8.25,28.45 8.25,24.35 8.45,24.15 8.684,23.916 8.2,23.433 ccw(c8.212,23.421) 8.2,23.409 8.417,23.193 ccw(c8.429,23.205) 8.441,23.193 8.924,23.676 9.013,23.765 cw(c9.025,23.753) 9.037,23.765 9.254,23.549 cw(c9.242,23.537) 9.254,23.525 9.164,23.436 8.681,22.952 ccw(c8.693,22.94) 8.681,22.928 8.897,22.712 ccw(c8.909,22.724) 8.921,22.712 9.405,23.195 9.525,23.075 10.075,22.525 10.228,22.372 10.372,22.372 IC1.17
D6: IC1.18 J1.12 | length 17.3
  Top Layer w0.17: J1.12 4.668,16.033 5.153,16.033 5.66,16.54 5.744,16.624 ccw(c5.708,16.66) 5.744,16.697 5.515,16.926 cw(c5.551,16.962) 5.515,16.998 5.683,17.166 cw(c5.719,17.13) 5.755,17.166 6.02,16.901 6.257,16.664 ccw(c6.293,16.7) 6.329,16.664 6.497,16.832 ccw(c6.461,16.869) 6.497,16.905 6.261,17.141 5.996,17.407 cw(c6.032,17.443) 5.996,17.479 6.164,17.647 cw(c6.2,17.611) 6.236,17.647 6.501,17.382 6.766,17.116 ccw(c6.802,17.153) 6.839,17.116 7.007,17.285 ccw(c6.971,17.321) 7.007,17.357 6.742,17.622 6.476,17.887 cw(c6.512,17.923) 6.476,17.959 6.645,18.128 cw(c6.681,18.092) 6.717,18.128 6.982,17.863 7.247,17.597 ccw(c7.283,17.633) 7.319,17.597 7.488,17.766 ccw(c7.452,17.802) 7.488,17.838 7.222,18.103 6.957,18.368 cw(c6.993,18.404) 6.957,18.44 7.125,18.609 cw(c7.162,18.573) 7.198,18.609 7.463,18.343 7.728,18.078 ccw(c7.764,18.114) 7.8,18.078 7.969,18.246 ccw(c7.932,18.282) 7.969,18.319 7.703,18.584 7.438,18.849 cw(c7.474,18.885) 7.438,18.921 7.606,19.089 cw(c7.642,19.053) 7.678,19.089 7.944,18.824 8.209,18.559 ccw(c8.245,18.595) 8.281,18.559 8.449,18.727 ccw(c8.413,18.763) 8.449,18.799 8.22,19.029 cw(c8.256,19.065) 8.22,19.101 8.397,19.278 8.71,19.591 8.71,19.963 10.812,22.065 IC1.18
D7: IC1.19 J1.8 | length 17.2
  Top Layer w0.17: J1.8 5.7,11.985 5.7,13.85 6.275,14.425 7.625,14.425 8.98,15.78 8.98,15.95 8.98,16.239 cw(c9.031,16.239) 9.031,16.29 9.088,16.29 ccw(c9.088,16.341) 9.139,16.341 9.139,16.579 ccw(c9.088,16.579) 9.088,16.63 8.98,16.63 8.59,16.63 cw(c8.59,16.681) 8.539,16.681 8.539,16.919 cw(c8.59,16.919) 8.59,16.97 8.98,16.97 9.088,16.97 ccw(c9.088,17.021) 9.139,17.021 9.139,17.259 ccw(c9.088,17.259) 9.088,17.31 8.98,17.31 8.59,17.31 cw(c8.59,17.361) 8.539,17.361 8.539,17.599 cw(c8.59,17.599) 8.59,17.65 8.98,17.65 9.088,17.65 ccw(c9.088,17.701) 9.139,17.701 9.139,17.939 ccw(c9.088,17.939) 9.088,17.99 9.031,17.99 cw(c9.031,18.041) 8.98,18.041 8.98,18.675 8.98,19.38 9.1,19.5 9.1,19.673 11.182,21.754 IC1.19
D8: IC1.20 J1.6 | length 17
  Top Layer w0.17: J1.6 5.775,9.52 5.775,11.45 6.25,11.925 7.45,11.925 9.475,13.95 9.475,19.332 11.571,21.428 IC1.20
D9: IC1.21 J1.7 | length 17.5
  Top Layer w0.17: J1.7@7.208,10.387 J1.7 8.345,10.67 8.465,10.79 8.67,10.995 cw(c8.706,10.958) 8.742,10.995 9.017,10.72 ccw(c9.053,10.756) 9.089,10.72 9.257,10.888 ccw(c9.221,10.924) 9.257,10.96 8.946,11.271 8.635,11.582 cw(c8.671,11.618) 8.635,11.654 8.803,11.823 cw(c8.839,11.786) 8.875,11.823 9.186,11.511 9.498,11.2 ccw(c9.534,11.236) 9.57,11.2 9.738,11.369 ccw(c9.702,11.405) 9.738,11.441 9.427,11.752 9.116,12.063 cw(c9.152,12.099) 9.116,12.135 9.284,12.303 cw(c9.32,12.267) 9.356,12.303 9.631,12.028 ccw(c9.667,12.064) 9.703,12.028 9.908,12.233 10,12.325 10,19.142 IC1.21@11.96,21.101
DAC_G: C19.2 IC2.10 IC3.8 SP2.1 | length 27.5
  Top Layer w0.17: IC3.8 7.325,21.775 v4(8.25,21.775) ; v2(28.675,24.785) 29.26,24.2 IC2.10
  Top Layer w0.2: IC2.10 29.29,25.39 C19.2 SP2.1
  Bottom Layer w0.17: v4(8.25,21.775) 9.225,21.775 13.675,26.225 16.625,26.225 17.4,25.45 25.225,25.45 25.89,24.785 v2(28.675,24.785)
DCO: IC1.22 J1.5 | length 17
  Top Layer w0.17: J1.5 8.33,8.13 8.5,8.3 8.56,8.36 ccw(c8.5,8.42) 8.56,8.48 8.163,8.877 cw(c8.224,8.937) 8.163,8.997 8.284,9.117 cw(c8.344,9.057) 8.404,9.117 8.801,8.721 ccw(c8.861,8.781) 8.921,8.721 9.1,8.9 10.5,10.3 10.5,18.926 IC1.22@12.349,20.775
GND: C2.2 C5.1 C6.1 C7.1 C10.1 C11.2 C12.2 C13.2 C14.2 C15.2 C18.2 C19.1 C20.1 C21.2 C22.2 C23.2 C24.1 C25.1 C26.1 C27.1 C28.2 C29.2 C30.2 C31.1 C32.1 C33.2 C34.2 D1.1 D1.2 IC1.26 IC1.33 IC2.6 IC2.9 IC2.17 IC2.20 IC3.5 IC3.7 J1.3 J1.4 J2.3 J2.4 K1.2 PS1.1 R3.1 R8.2 U2.2 | length 42.4
  Top Layer w0.381: v4(17.525,9.075) C26.1 C27.1 v1(19.275,8.45) ; C32.1 18.225,7.15 v1(18.8,7.15) ; C33.2 21.175,5.675 v1(22.775,5.675)
  Top Layer w0.4: C30.2 v2(4.225,23) ; C28.2 5.35,24.225 v2(5.375,24.25) ; IC3.5 IC3.5@7.3,19.75 ; IC3.7 v4(8.45,21.075) ; v3(10.975,3.475) C34.2 ; v3(11.3,18.05) 11.836,18.586 C11.2 ; v1(11.675,17.15) 11.675,16.2 C31.1 C31.1@11.725,16.2 ; v2(11.95,29.775) 12.412,29.313 12.487,29.313 C23.2 12.395,29.27 12.086,28.961 12.086,28.159 12.083,28.156 12.083,27.948 C22.2 ; v1(12.925,15.6) 12.95,15.625 C5.1 ; C6.1 14.377,16.248 14.323,16.248 14.25,16.175 14.275,16.175 v1(14.275,15.6) ; PS1.1 15.525,11.975 v1(15.55,11.95) ; v1(15.825,15.5) C15.2 ; C2.2 16.295,19.455 v3(16.8,18.95) ; U2.2 16.748,6.979 17.859,6.979 18.125,7.245 C32.1 ; C12.2@16.945,20.236 16.989,20.236 v1(17.45,19.775) ; C13.2 17.064,26.489 v1(17.575,27) ; v1(17.1,11.925) C29.2 ; C18.2 17.739,25.689 v1(18.3,26.25) ; C14.2 18.575,23.05 18.575,23.75 18.775,23.95 18.775,24 18.875,24.1 R3.1 18.9,24.125 v3(18.9,24.775) ; C20.1 v1(21.975,27.325) ; R8.2 22.8,26.675 22.85,26.675 22.9,26.725 v1(22.9,27.475) ; C24.1 23.35,8.175 v1(23.375,8.15) ; C21.2 23.825,26.35 23.825,27.175 v1(23.85,27.2) ; v1(24.3,8.175) C25.1 ; IC2.6 29.295,21.675 v3(30.13,21.675) ; IC2.9 29.655,23.59 29.675,23.61 30.51,23.61 v1(30.65,23.75) ; C19.1 30.25,25.4 30.275,25.425 v1(31.05,25.425) ; v3(30.85,16.45) C7.1 C10.1 31.875,17.125 v3(31.875,16.5) ; v3(33.125,14.45) D1.1 D1.2 v3(35.025,14.5) ; v1(35.55,25.575) K1.2@38.425,25.575 ; v1(38.425,15.675) K1.2@38.425,17.075
  Bottom Layer w0.4: v1@12.925,15.575 v1(12.925,15.6)
  other v1: 13.275,21.825 12.6,22.4 13.875,22.525 11.975,23 13.125,23.125 14.5,23.2 12.525,23.675 13.8,23.775 13.125,24.3
  other v4: 1.625,21.725
MOSI: IC3.4 J1.11 | length 9.9
  Top Layer w0.17: IC3.4 2.925,19.725 2.925,15.2 3.575,14.55 5.475,14.55 6.675,15.75 J1.11
  Top Layer w0.25: IC3.4 3.235,19.775 IC3.4@3.335,19.675
NetC1_1: C1.1 R2.1 | length 1.1
  Top Layer w0.2: R2.1 20.325,22.825 C1.1
NetC1_2: C1.2 FB1.2 R1.2 | length 2.8
  Top Layer w0.2: FB1.2@20.325,24.225 21.05,23.5 21.05,23.095 21.27,22.875 C1.2 21.325,22.825 R1.2
NetC3_1: C3.1 R5.1 | length 1
  Top Layer w0.2: C3.1 20.325,19.975 R5.1
NetC3_2: C3.2 FB2.2 R4.2 | length 2.9
  Top Layer w0.2: FB2.2 20.875,19.55 20.875,19.63 C3.2@21.095,19.85 ; C3.2 C3.2@21.095,19.85 ; R4.2 21.225,20.8 21.225,19.98 C3.2@21.095,19.85
NetC4_1: C4.1 IC1.31 R2.2 | length 3.6
  Top Layer w0.2: IC1.31 15.956,22.544 16.525,21.975 17.275,21.975 17.45,21.8 C4.1 19.2,21.8 R2.2
NetC4_2: C4.2 IC1.30 R5.2 | length 4.2
  Top Layer w0.2: IC1.30 15.669,22.174 16.093,21.75 16.298,21.75 16.548,21.5 16.8,21.5 17.4,20.9 C4.2 19.15,20.9 R5.2
NetC5_2: C5.2 C6.2 IC1.25 | length 4
  Top Layer w0.2: IC1.25 14.032,20.248 14.525,19.755 14.525,18.4 C6.2
  Top Layer w0.4: C5.2 12.95,17.555 13.52,18.125 C6.2
NetC7_2: C7.2 IC2.1 | length 1.7
  Top Layer w0.2: IC2.1 29.31,18.45 30.455,18.45 30.85,18.055 C7.2
NetC8_1: C8.1 FB3.2 | length 1.8
  Top Layer w0.2: C8.1 32.625,24.15 FB3.2
NetC8_2: C8.2 C9.2 C10.2 IC2.2 | length 8.8
  Top Layer w0.2: IC2.2 29.41,18.99 30.332,18.99 30.572,18.75 31.278,18.75 31.459,18.931 31.459,18.934 C9.2@31.825,19.3 ; C9.2 C9.2@31.825,19.3 ; C10.2 C10.2@31.825,18.075 ; C8.2 32.625,21.47 33.175,20.92 33.175,18.675 32.575,18.075 C10.2@31.825,18.075 ; C10.2@31.825,18.075 C9.2@31.825,19.3
NetC9_1: C9.1 R7.2 | length 1.6
  Top Layer w0.2: C9.1 30.93,19.325 31.3,19.695 31.3,19.728 31.772,20.2 31.85,20.2 R7.2
NetC16_1: C16.1 IC2.7 | length 1.5
  Top Layer w0.2: IC2.7 30.685,22.31 C16.1
NetC16_2: C16.2 IC2.5 | length 1.6
  Top Layer w0.2: IC2.5 29.33,21.07 30.35,21.07 30.75,21.47 C16.2
NetC17_1: C17.1 IC2.8 | length 3.3
  Top Layer w0.2: IC2.8@29.329,22.989 IC2.8 29.34,22.9 30.201,22.9 30.451,23.15 31.525,23.15 31.675,23 31.675,22.425 31.65,22.4 C17.1
NetC17_2: C17.2 IC2.4 R7.1 | length 3.1
  Top Layer w0.2: IC2.4 30.94,20.39 R7.1 31,20.4 31.2,20.6 31.2,20.65 31.455,20.905 31.455,21.255 C17.2
NetC18_1: C18.1 IC1.2 | length 1.6
  Top Layer w0.2: IC1.2 15.788,24.213 16.275,24.7 16.59,24.7 16.98,25.09 C18.1
NetC20_2: C20.2 IC2.12 R8.1 | length 3.9
  Top Layer w0.2: C20.2 R8.1 22.775,25.35 22.775,23.775 22.975,23.575 23.825,23.575 23.85,23.6 IC2.12
NetC32_2: C32.2 U2.4 | length 1.4
  Top Layer w0.4: U2.4 16.748,8.221 18.054,8.221 C32.2
NetD1_3: D1.3 FB3.1 U1.3 | length 6.6
  Top Layer w0.2: D1.3 34.175,17.85 U1.3 34.2,22.55 34.2,23.5 34.45,23.75 34.45,24.125 34.4,24.175 FB3.1
NetIC1_28: IC1.28 R3.2 | length 9.7
  Top Layer w0.17: IC1.28 15.029,21.396 v4(15.35,21.075) ; v4(17.325,24) 17.725,24 R3.2
  Bottom Layer w0.17: v4(15.35,21.075) 15.775,21.5 15.775,24.3 15,25.075 15,25.425 15.475,25.9 16.3,25.9 17.325,24.875 v4(17.325,24)
NetIC2_13: IC2.13 R11.2 | length 9.5
  Top Layer w0.2: IC2.13 26.15,22.95 26.7,22.4 R11.2
NetIC2_14: IC2.14 R10.2 | length 8
  Top Layer w0.2: IC2.14 25.365,22.31 25.7,21.975 R10.2
NetIC2_18: IC2.18 R9.2 | length 4.1
  Top Layer w0.2: R9.2 22.175,16.975 22.375,17.175 22.375,17.225 22.575,17.425 22.575,19.375 22.9,19.7 23.76,19.7 23.785,19.725 23.81,19.7 IC2.18
NetIC2_19: IC2.19 R6.2 | length 4.9
  Top Layer w0.2: R6.2 22.125,15.95 22.758,15.95 22.875,16.067 22.875,18.925 23.075,19.125 23.845,19.125 IC2.19 IC2.19@23.74,18.99
NetK1_1: K1.1 U1.1 | length 3.6
  Top Layer w0.2: U1.1 37.175,22.125 37.975,21.325 K1.1
SCLK: IC3.3 J1.10 | length 10
  Top Layer w0.17: IC3.3 1.95,20.425 1.65,20.125 1.65,14.925 3.185,13.39 4.205,13.39 J1.10
VCM: C2.1 C21.1 IC1.27 IC2.11 SP1.1 | length 25
  Top Layer w0.2: C21.1 23.85,25.43 24.07,25.65 24.4,25.65 25.047,26.297 25.047,26.872 SP1.1
  Top Layer w0.25: IC1.27 14.668,21.007 v4(15.137,20.538) 15.605,20.07 C2.1 ; C21.1 23.9,25.375 v4@23.9,24.823 ; IC2.11 23.9,24.27 v4@23.9,24.823 ; v4(23.895,24.818) v4@23.9,24.823
  Bottom Layer w0.25: v4(15.137,20.538) 12.613,20.538 12.1,20.025 12.1,18.725 13.5,17.325 16.402,17.325 v4(23.895,24.818)
VOH: FB1.1 IC2.15 R1.1 | length 4
  Top Layer w0.2: FB1.1@22.075,24.225 22.075,23.35 22.425,23 R1.1 22.5,21.8 22.925,21.8 23.05,21.675 23.855,21.675 IC2.15
VOL: FB2.1 IC2.16 R4.1 | length 4.2
  Top Layer w0.2: FB2.1 21.75,18.675 21.75,19.45 22.4,20.1 R4.1 22.555,21.03 IC2.16
pads on no net: IC1.4 IC1.5 IC1.6 IC1.7 IC1.8 IC1.9 IC1.10 IC1.23 IC3.6 J2.12 U1.2 U2.3 U2.6 U2.7

## Polygon pours and split planes (outlines as drawn)
GND on Bottom Layer "Bottom Layer-GND" (solid, pour order 2): 1.25,0.6 0.6,1.25 0.599,1.3 0.526,41.75 1.425,42.65 42.3,42.65 42.663,42.287 42.713,1.362 41.95,0.6
GND on Top Layer "Top Layer-GND" (solid, pour order 0): 1.95,0.65 0.822,1.903 0.727,41.95 1.45,42.7 42.275,42.7 42.7,42.3 42.7,1.35 42,0.65
GND on Int1 (GND) (split plane): 41.474,42.67 41.525,42.665 41.534,42.665 41.542,42.666 41.55,42.667 41.676,42.658 41.8,42.634 41.92,42.593 42.033,42.537 42.139,42.467 42.234,42.384 42.317,42.289 42.387,42.183 42.443,42.07 42.484,41.95 42.508,41.826 42.515,41.728 42.515,41.725 42.515,1.5 42.516,1.483 42.517,1.475 42.508,1.349 42.484,1.225 42.443,1.105 42.387,0.992 42.317,0.886 42.234,0.791 42.139,0.708 42.033,0.638 41.92,0.582 41.8,0.541 41.676,0.517 41.578,0.51 41.575,0.51 41.55,0.51 1.5,0.51 1.491,0.51 1.483,0.509 1.475,0.508 1.349,0.517 1.225,0.541 1.105,0.582 0.992,0.638 0.886,0.708 0.791,0.791 0.708,0.886 0.638,0.992 0.582,1.105 0.541,1.225 0.517,1.349 0.51,1.447 0.51,1.45 0.51,41.675 0.51,41.684 0.509,41.692 0.508,41.7 0.517,41.826 0.541,41.95 0.582,42.07 0.638,42.183 0.708,42.289 0.791,42.384 0.886,42.467 0.992,42.537 1.105,42.593 1.225,42.634 1.349,42.658 1.447,42.665 1.45,42.665 1.459,42.665 1.501,42.67
GND on Int2 (GND) (split plane): 41.474,42.67 41.525,42.665 41.534,42.665 41.542,42.666 41.55,42.667 41.676,42.658 41.8,42.634 41.92,42.593 42.033,42.537 42.139,42.467 42.234,42.384 42.317,42.289 42.387,42.183 42.443,42.07 42.484,41.95 42.508,41.826 42.515,41.728 42.515,41.725 42.515,1.5 42.516,1.483 42.517,1.475 42.508,1.349 42.484,1.225 42.443,1.105 42.387,0.992 42.317,0.886 42.234,0.791 42.139,0.708 42.033,0.638 41.92,0.582 41.8,0.541 41.676,0.517 41.578,0.51 41.575,0.51 41.55,0.51 1.5,0.51 1.491,0.51 1.483,0.509 1.475,0.508 1.349,0.517 1.225,0.541 1.105,0.582 0.992,0.638 0.886,0.708 0.791,0.791 0.708,0.886 0.638,0.992 0.582,1.105 0.541,1.225 0.517,1.349 0.51,1.447 0.51,1.45 0.51,41.675 0.51,41.684 0.509,41.692 0.508,41.7 0.517,41.826 0.541,41.95 0.582,42.07 0.638,42.183 0.708,42.289 0.791,42.384 0.886,42.467 0.992,42.537 1.105,42.593 1.225,42.634 1.349,42.658 1.447,42.665 1.45,42.665 1.459,42.665 1.501,42.67

## Silkscreen, mask and mechanical layers (free items; w line width, h text height)
Top Overlay:
  text "AFE v1.0" at 26.55,39.925 h1.5
  text "@kelu124" at 35.75,5.025 h0.7
  text "http://un0rick.cc/goodies/afe" at 22.15,2.775 h0.7
Bottom Overlay:
  text "VGA:AD8331ARQZ" at 29.7,36.75 h0.7
  text "ADC:AD9629BCPZ-65" at 30.5,35.075 h0.7
  text "DAC:MCP4812-E_MS" at 30.5,33.425 h0.7
Mechanical 1:
  lines w0.4: 1.45,43.175 ccw(c1.475,41.7) 0,41.675 0,1.45 ccw(c1.475,1.475) 1.5,0 41.55,0 ; 1.45,43.18 41.525,43.18 ; 4.225,88.4 cw(c5.7,88.425) 5.675,89.9 ; 41.525,43.175 cw(c41.55,41.7) 43.025,41.725 43.025,1.5 cw(c41.55,1.475) 41.575,0